# EAGLE board X04A-010-B-XB (EAGLE 9.6.2)
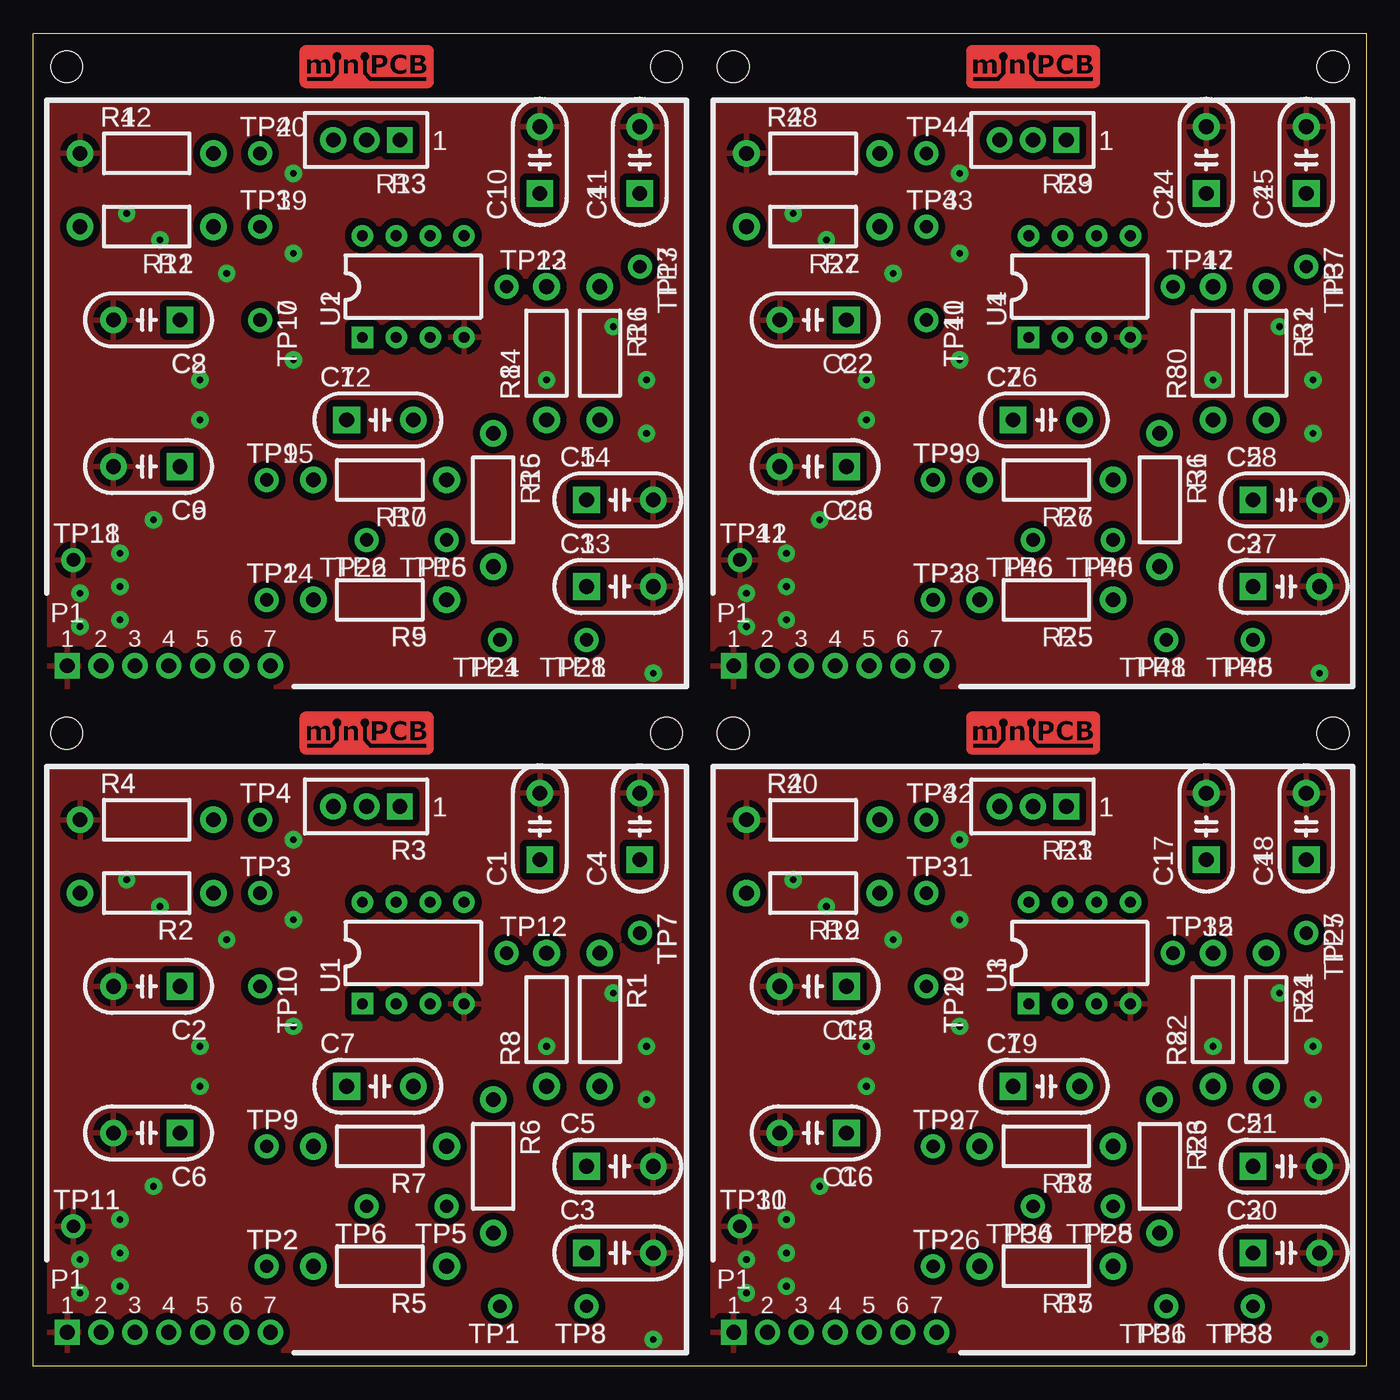
[diagram p0: board, top side]
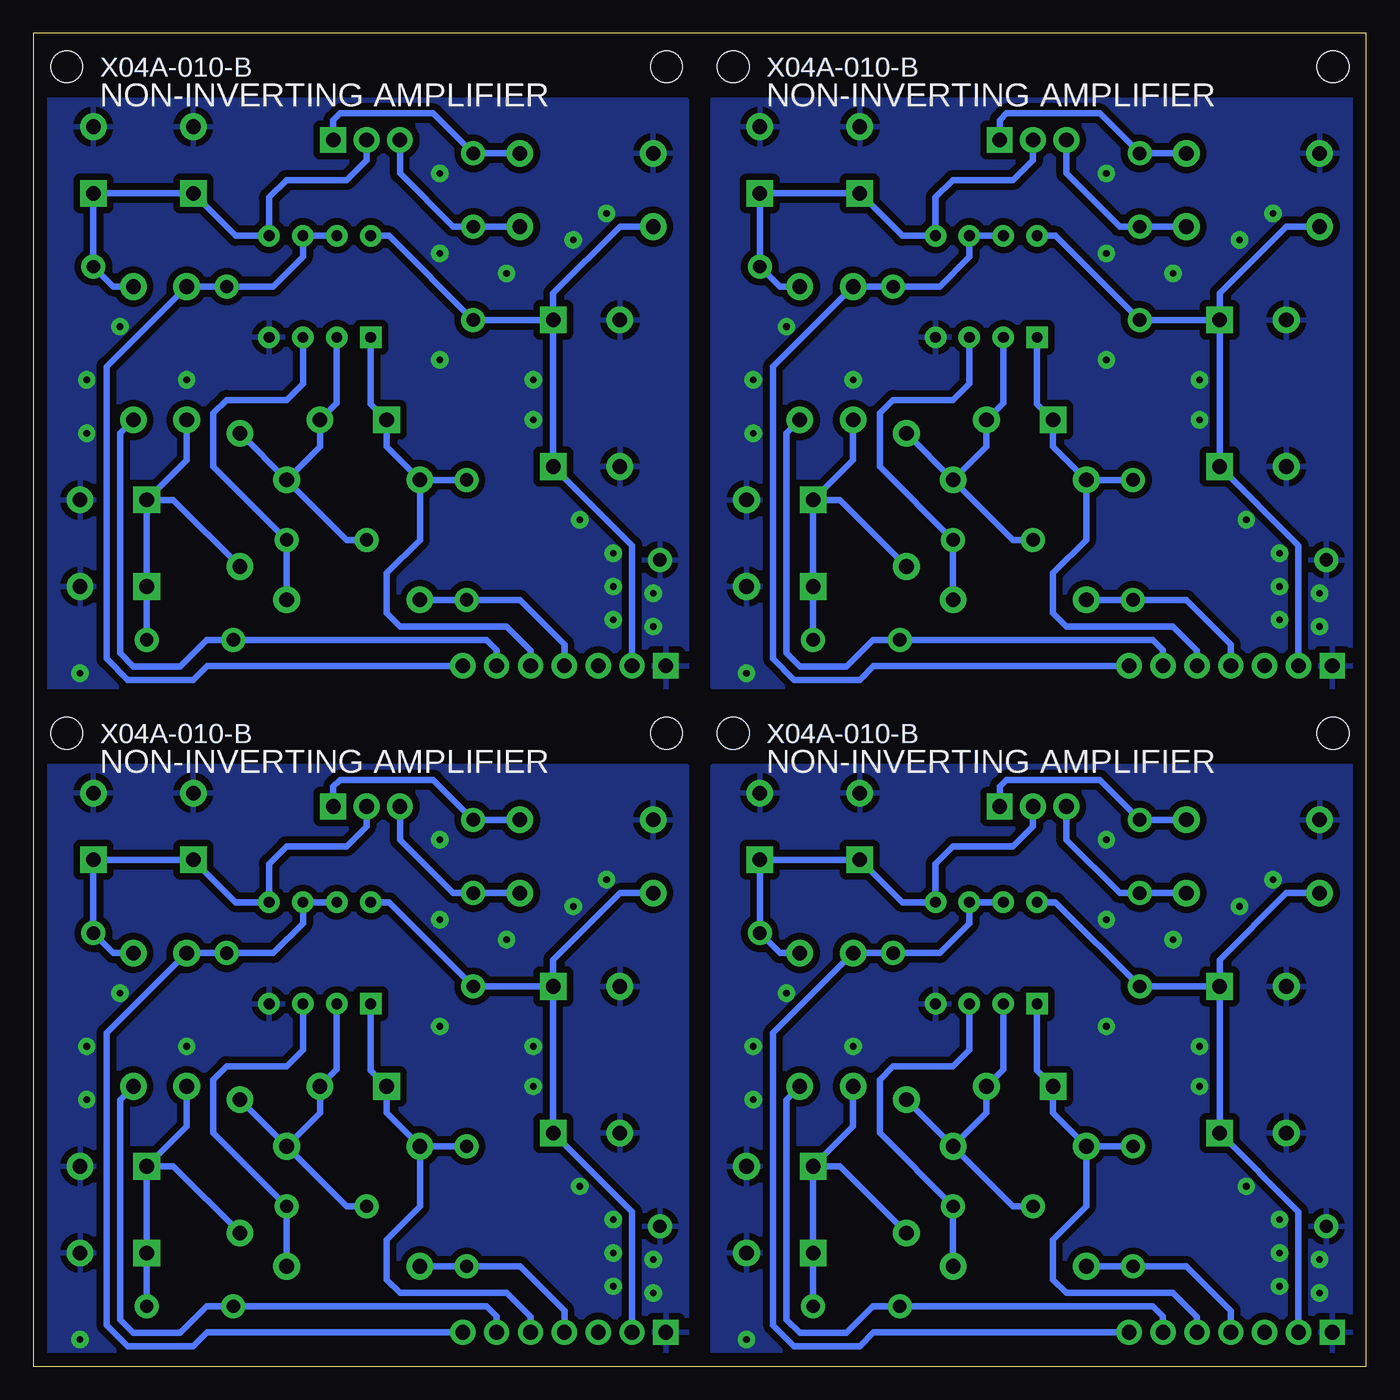
[diagram p1: board, bottom side, seen from below]

Size 100 x 100 mm. Coordinates in mm from the lower left corner, seen from the top.
Outline: 0,0 0,100 100,100 100,0 0,0
Copper layers (1*16): Top 0.035mm / dielectric 1.5mm / Bottom 0.035mm
Design rules "minipcb-THD": minimum track width 0.5mm, minimum drill 0.5mm, track to track 0.5mm, track to pad 0.5mm, pad to pad 0.5mm, via to via 0.5mm, smd to smd 0mil, copper to edge 1mm, drill to drill 1mm, minimum pad ring 0.4mm, minimum via ring 0.4mm, stop-mask expansion 0.1mm, vias tented up to drill 0.6mm, thermal gap 0.5mm

## Footprints (pad centres in the part's own frame; a part is rotated, then mirrored left to right if it is on the bottom)
C050-024X044 = drill 1.1 pad 2 square: 1 -2.5,0 | drill 1.1 pad 2: 2 2.5,0
MINIPCB_7P_50X50 = drill 1.1 square: 1 2.54,2.54 | drill 1.1: 2 5.08,2.54; 3 7.62,2.54; 4 10.16,2.54; 5 12.7,2.54; 6 15.24,2.54; 7 17.78,2.54 | hole 2.4: 47.5,47.5; 2.5,47.5
0207/10 = drill 1.1 pad 2: 1 -5,0; 2 5,0
TRIM_0100 = drill 1.1 pad 1.93 square: 1 0,0 | drill 1.1 pad 1.93: 2 2.5,0; 3 5,0
PINS_1_TESTPOINT_KE5000_NOTEXT = drill 1: 1 0,0
DIL08 = drill 0.813 square: 1 -3.81,-3.81 | drill 0.813: 2 -1.27,-3.81; 3 1.27,-3.81; 4 3.81,-3.81; 5 3.81,3.81; 6 1.27,3.81; 7 -1.27,3.81; 8 -3.81,3.81

## Placement (x,y rotation side)
C1  [C050-024X044]  38,40.5 90 top
C2  [C050-024X044]  8.5,28.5 180 top
C3  [C050-024X044]  44,8.5 0 top
C4  [C050-024X044]  45.5,40.5 90 top
C5  [C050-024X044]  44,15 0 top
C6  [C050-024X044]  8.5,17.5 180 top
C7  [C050-024X044]  26,21 0 top
C8  [C050-024X044]  8.5,78.5 180 top
C9  [C050-024X044]  8.5,67.5 180 top
C10  [C050-024X044]  38,90.5 90 top
C11  [C050-024X044]  45.5,90.5 90 top
C12  [C050-024X044]  26,71 0 top
C13  [C050-024X044]  44,58.5 0 top
C14  [C050-024X044]  44,65 0 top
C15  [C050-024X044]  58.5,28.5 180 top
C16  [C050-024X044]  58.5,17.5 180 top
C17  [C050-024X044]  88,40.5 90 top
C18  [C050-024X044]  95.5,40.5 90 top
C19  [C050-024X044]  76,21 0 top
C20  [C050-024X044]  94,8.5 0 top
C21  [C050-024X044]  94,15 0 top
C22  [C050-024X044]  58.5,78.5 180 top
C23  [C050-024X044]  58.5,67.5 180 top
C24  [C050-024X044]  88,90.5 90 top
C25  [C050-024X044]  95.5,90.5 90 top
C26  [C050-024X044]  76,71 0 top
C27  [C050-024X044]  94,58.5 0 top
C28  [C050-024X044]  94,65 0 top
E$1  [MINIPCB_PANEL_IMAGEFRAME]  -25,-30 0 top  (outside the outline)
P1-  [MINIPCB_7P_50X50]  0,0 0 top
P1-1  [MINIPCB_7P_50X50]  0,50 0 top
P1-2  [MINIPCB_7P_50X50]  50,0 0 top
P1-3  [MINIPCB_7P_50X50]  50,50 0 top
R1  [0207/10]  42.5,26 270 top
R2  [0207/10]  8.5,35.5 180 top
R3  [TRIM_0100]  27.5,42 180 top
R4  [0207/10]  8.5,41 0 top
R5  [0207/10]  26,7.5 180 top
R6  [0207/10]  34.5,15 270 top
R7  [0207/10]  26,16.5 180 top
R8  [0207/10]  38.5,26 90 top
R9  [0207/10]  26,57.5 180 top
R10  [0207/10]  26,66.5 180 top
R11  [0207/10]  8.5,85.5 180 top
R12  [0207/10]  8.5,91 0 top
R13  [TRIM_0100]  27.5,92 180 top
R14  [0207/10]  38.5,76 90 top
R15  [0207/10]  34.5,65 270 top
R16  [0207/10]  42.5,76 270 top
R17  [0207/10]  76,7.5 180 top
R18  [0207/10]  76,16.5 180 top
R19  [0207/10]  58.5,35.5 180 top
R20  [0207/10]  58.5,41 0 top
R21  [TRIM_0100]  77.5,42 180 top
R22  [0207/10]  88.5,26 90 top
R23  [0207/10]  84.5,15 270 top
R24  [0207/10]  92.5,26 270 top
R25  [0207/10]  76,57.5 180 top
R26  [0207/10]  76,66.5 180 top
R27  [0207/10]  58.5,85.5 180 top
R28  [0207/10]  58.5,91 0 top
R29  [TRIM_0100]  77.5,92 180 top
R30  [0207/10]  88.5,76 90 top
R31  [0207/10]  84.5,65 270 top
R32  [0207/10]  92.5,76 270 top
TP1  [PINS_1_TESTPOINT_KE5000_NOTEXT]  35,4.5 180 top
TP2  [PINS_1_TESTPOINT_KE5000_NOTEXT]  17.5,7.5 0 top
TP3  [PINS_1_TESTPOINT_KE5000_NOTEXT]  17,35.5 0 top
TP4  [PINS_1_TESTPOINT_KE5000_NOTEXT]  17,41 0 top
TP5  [PINS_1_TESTPOINT_KE5000_NOTEXT]  31,12 180 top
TP6  [PINS_1_TESTPOINT_KE5000_NOTEXT]  25,12 180 top
TP7  [PINS_1_TESTPOINT_KE5000_NOTEXT]  45.5,32.5 270 top
TP8  [PINS_1_TESTPOINT_KE5000_NOTEXT]  41.5,4.5 180 top
TP9  [PINS_1_TESTPOINT_KE5000_NOTEXT]  17.5,16.5 0 top
TP10  [PINS_1_TESTPOINT_KE5000_NOTEXT]  17,28.5 270 top
TP11  [PINS_1_TESTPOINT_KE5000_NOTEXT]  3,10.5 0 top
TP12  [PINS_1_TESTPOINT_KE5000_NOTEXT]  35.5,31 270 top
TP13  [PINS_1_TESTPOINT_KE5000_NOTEXT]  45.5,82.5 270 top
TP14  [PINS_1_TESTPOINT_KE5000_NOTEXT]  17.5,57.5 0 top
TP15  [PINS_1_TESTPOINT_KE5000_NOTEXT]  17.5,66.5 0 top
TP16  [PINS_1_TESTPOINT_KE5000_NOTEXT]  31,62 180 top
TP17  [PINS_1_TESTPOINT_KE5000_NOTEXT]  17,78.5 270 top
TP18  [PINS_1_TESTPOINT_KE5000_NOTEXT]  3,60.5 0 top
TP19  [PINS_1_TESTPOINT_KE5000_NOTEXT]  17,85.5 0 top
TP20  [PINS_1_TESTPOINT_KE5000_NOTEXT]  17,91 0 top
TP21  [PINS_1_TESTPOINT_KE5000_NOTEXT]  41.5,54.5 180 top
TP22  [PINS_1_TESTPOINT_KE5000_NOTEXT]  25,62 180 top
TP23  [PINS_1_TESTPOINT_KE5000_NOTEXT]  35.5,81 270 top
TP24  [PINS_1_TESTPOINT_KE5000_NOTEXT]  35,54.5 180 top
TP25  [PINS_1_TESTPOINT_KE5000_NOTEXT]  95.5,32.5 270 top
TP26  [PINS_1_TESTPOINT_KE5000_NOTEXT]  67.5,7.5 0 top
TP27  [PINS_1_TESTPOINT_KE5000_NOTEXT]  67.5,16.5 0 top
TP28  [PINS_1_TESTPOINT_KE5000_NOTEXT]  81,12 180 top
TP29  [PINS_1_TESTPOINT_KE5000_NOTEXT]  67,28.5 270 top
TP30  [PINS_1_TESTPOINT_KE5000_NOTEXT]  53,10.5 0 top
TP31  [PINS_1_TESTPOINT_KE5000_NOTEXT]  67,35.5 0 top
TP32  [PINS_1_TESTPOINT_KE5000_NOTEXT]  67,41 0 top
TP33  [PINS_1_TESTPOINT_KE5000_NOTEXT]  91.5,4.5 180 top
TP34  [PINS_1_TESTPOINT_KE5000_NOTEXT]  75,12 180 top
TP35  [PINS_1_TESTPOINT_KE5000_NOTEXT]  85.5,31 270 top
TP36  [PINS_1_TESTPOINT_KE5000_NOTEXT]  85,4.5 180 top
TP37  [PINS_1_TESTPOINT_KE5000_NOTEXT]  95.5,82.5 270 top
TP38  [PINS_1_TESTPOINT_KE5000_NOTEXT]  67.5,57.5 0 top
TP39  [PINS_1_TESTPOINT_KE5000_NOTEXT]  67.5,66.5 0 top
TP40  [PINS_1_TESTPOINT_KE5000_NOTEXT]  81,62 180 top
TP41  [PINS_1_TESTPOINT_KE5000_NOTEXT]  67,78.5 270 top
TP42  [PINS_1_TESTPOINT_KE5000_NOTEXT]  53,60.5 0 top
TP43  [PINS_1_TESTPOINT_KE5000_NOTEXT]  67,85.5 0 top
TP44  [PINS_1_TESTPOINT_KE5000_NOTEXT]  67,91 0 top
TP45  [PINS_1_TESTPOINT_KE5000_NOTEXT]  91.5,54.5 180 top
TP46  [PINS_1_TESTPOINT_KE5000_NOTEXT]  75,62 180 top
TP47  [PINS_1_TESTPOINT_KE5000_NOTEXT]  85.5,81 270 top
TP48  [PINS_1_TESTPOINT_KE5000_NOTEXT]  85,54.5 180 top
U1  [DIL08]  28.5,31 0 top
U2  [DIL08]  28.5,81 0 top
U3  [DIL08]  78.5,31 0 top
U4  [DIL08]  78.5,81 0 top

## Library data of the parts
C1-C28 E$1 R1-R32 TP1-TP48 U1-U4 = minipcb
P1- P1-1-P1-3 = minipcb; PART_NUMBER: X04A-010-B; REVISION: B

## Nets
BIAS: C1.1 C4.1 R1.1 R3.2 TP7.1 U1.5
BIAS1: C10.1 C11.1 R13.2 R16.1 TP13.1 U2.5
BIAS2: C17.1 C18.1 R21.2 R24.1 TP25.1 U3.5
BIAS3: C24.1 C25.1 R29.2 R32.1 TP37.1 U4.5
BIAS_CONTROL: P1-.6 R1.2 TP1.1
BIAS_CONTROL1: P1-1.6 R16.2 TP24.1
BIAS_CONTROL2: P1-2.6 R24.2 TP36.1
BIAS_CONTROL3: P1-3.6 R32.2 TP48.1
GND: C1.2 C2.2 C3.2 C4.2 C5.2 C6.2 P1-.1 R4.1 TP11.1 U1.4
GND1: C8.2 C9.2 C10.2 C11.2 C13.2 C14.2 P1-1.1 R12.1 TP18.1 U2.4
GND2: C15.2 C16.2 C17.2 C18.2 C20.2 C21.2 P1-2.1 R20.1 TP30.1 U3.4
GND3: C22.2 C23.2 C24.2 C25.2 C27.2 C28.2 P1-3.1 R28.1 TP42.1 U4.4
IN: P1-.4 R5.2 TP2.1
IN1: P1-1.4 R9.2 TP14.1
IN2: P1-2.4 R17.2 TP26.1
IN3: P1-3.4 R25.2 TP38.1
IN+: R5.1 TP5.1 U1.3
IN+1: R9.1 TP16.1 U2.3
IN+2: R17.1 TP28.1 U3.3
IN+3: R25.1 TP40.1 U4.3
NC: P1-.3
NC1: P1-1.3
NC2: P1-2.3
NC3: P1-3.3
OUT: C7.1 P1-.5 R7.2 TP9.1 U1.1
OUT1: C12.1 P1-1.5 R10.2 TP15.1 U2.1
OUT2: C19.1 P1-2.5 R18.2 TP27.1 U3.1
OUT3: C26.1 P1-3.5 R26.2 TP39.1 U4.1
POT.1: R3.1 R4.2 TP4.1
POT.2: R11.1 R13.3 TP19.1
POT.3: R2.1 R3.3 TP3.1
POT.4: R12.2 R13.1 TP20.1
POT.5: R19.1 R21.3 TP31.1
POT.6: R20.2 R21.1 TP32.1
POT.7: R27.1 R29.3 TP43.1
POT.8: R28.2 R29.1 TP44.1
V+: C2.1 C6.1 P1-.2 R2.2 TP10.1 U1.8
V+1: C8.1 C9.1 P1-1.2 R11.2 TP17.1 U2.8
V+2: C15.1 C16.1 P1-2.2 R19.2 TP29.1 U3.8
V+3: C22.1 C23.1 P1-3.2 R27.2 TP41.1 U4.8
VFB: C7.2 R6.1 R7.1 TP6.1 U1.2
VFB1: C12.2 R10.1 R15.1 TP22.1 U2.2
VFB2: C19.2 R18.1 R23.1 TP34.1 U3.2
VFB3: C26.2 R26.1 R31.1 TP46.1 U4.2
VREF: P1-.7 R8.2 TP12.1 U1.6 U1.7
VREF1: P1-1.7 R14.2 TP23.1 U2.6 U2.7
VREF2: P1-2.7 R22.2 TP35.1 U3.6 U3.7
VREF3: P1-3.7 R30.2 TP47.1 U4.6 U4.7
VREF_FILTERED: C3.1 C5.1 R6.2 R8.1 TP8.1
VREF_FILTERED1: C13.1 C14.1 R14.1 R15.2 TP21.1
VREF_FILTERED2: C20.1 C21.1 R22.1 R23.2 TP33.1
VREF_FILTERED3: C27.1 C28.1 R30.1 R31.2 TP45.1

## Tracks (layer width: path | path; a pad name or v marks a point on that pad's centre or on a via)
BIAS
  Bottom 0.5: R3.2 25,40.5 26.5,39 31,39 32.31,37.69 U1.5 34.81,34.81 C1.1 C4.1 TP7.1 44,31 R1.1
BIAS1
  Bottom 0.5: R13.2 25,90.5 26.5,89 31,89 32.31,87.69 U2.5 34.81,84.81 C10.1 C11.1 TP13.1 44,81 R16.1
BIAS2
  Bottom 0.5: R21.2 75,40.5 76.5,39 81,39 82.31,37.69 U3.5 84.81,34.81 C17.1 C18.1 TP25.1 94,31 R24.1
BIAS3
  Bottom 0.5: R29.2 75,90.5 76.5,89 81,89 82.31,87.69 U4.5 84.81,84.81 C24.1 C25.1 TP37.1 94,81 R32.1
BIAS_CONTROL
  Bottom 0.5: P1-.6 15.24,3.74 16,4.5 TP1.1 37,4.5 39,2.5 42.5,2.5 43.5,3.5 43.5,20 R1.2
BIAS_CONTROL1
  Bottom 0.5: P1-1.6 15.24,53.74 16,54.5 TP24.1 37,54.5 39,52.5 42.5,52.5 43.5,53.5 43.5,70 R16.2
BIAS_CONTROL2
  Bottom 0.5: P1-2.6 65.24,3.74 66,4.5 TP36.1 87,4.5 89,2.5 92.5,2.5 93.5,3.5 93.5,20 R24.2
BIAS_CONTROL3
  Bottom 0.5: P1-3.6 65.24,53.74 66,54.5 TP48.1 87,54.5 89,52.5 92.5,52.5 93.5,53.5 93.5,70 R32.2
GND  (via drill 0.5)
  other vias: 7,36.5 9.5,34.5 9,13.5 6.5,11 6.5,8.5 6.5,6 12.5,21 12.5,24 19.5,25.5 19.5,33.5 14.5,32 19.5,39.5 43.5,28 46,24 38.5,24 46,20 46.5,2 3.5,8 3.5,5.5
  pour Top: 1,1 49,1 49,45 1,45
  pour Bottom: 1,1 49,1 49,45 1,45
GND1  (via drill 0.5)
  other vias: 7,86.5 9.5,84.5 9,63.5 6.5,61 6.5,58.5 6.5,56 12.5,71 12.5,74 19.5,75.5 19.5,83.5 14.5,82 19.5,89.5 43.5,78 46,74 38.5,74 46,70 46.5,52 3.5,58 3.5,55.5
  pour Top: 1,51 49,51 49,95 1,95
  pour Bottom: 1,51 49,51 49,95 1,95
GND2  (via drill 0.5)
  other vias: 57,36.5 59.5,34.5 59,13.5 56.5,11 56.5,8.5 56.5,6 62.5,21 62.5,24 69.5,25.5 69.5,33.5 64.5,32 69.5,39.5 93.5,28 96,24 88.5,24 96,20 96.5,2 53.5,8 53.5,5.5
  pour Top: 51,1 99,1 99,45 51,45
  pour Bottom: 51,1 99,1 99,45 51,45
GND3  (via drill 0.5)
  other vias: 57,86.5 59.5,84.5 59,63.5 56.5,61 56.5,58.5 56.5,56 62.5,71 62.5,74 69.5,75.5 69.5,83.5 64.5,82 69.5,89.5 93.5,78 96,74 88.5,74 96,70 96.5,52 53.5,58 53.5,55.5
  pour Top: 51,51 99,51 99,95 51,95
  pour Bottom: 51,51 99,51 99,95 51,95
IN
  Bottom 0.5: R5.2 TP2.1 13.5,7.5 10.16,4.16 P1-.4
IN1
  Bottom 0.5: R9.2 TP14.1 13.5,57.5 10.16,54.16 P1-1.4
IN2
  Bottom 0.5: R17.2 TP26.1 63.5,7.5 60.16,4.16 P1-2.4
IN3
  Bottom 0.5: R25.2 TP38.1 63.5,57.5 60.16,54.16 P1-3.4
IN+
  Bottom 0.5: R5.1 TP5.1 36.5,17.5 36.5,21.5 35.5,22.5 31,22.5 29.77,23.73 U1.3
IN+1
  Bottom 0.5: R9.1 TP16.1 36.5,67.5 36.5,71.5 35.5,72.5 31,72.5 29.77,73.73 U2.3
IN+2
  Bottom 0.5: R17.1 TP28.1 86.5,17.5 86.5,21.5 85.5,22.5 81,22.5 79.77,23.73 U3.3
IN+3
  Bottom 0.5: R25.1 TP40.1 86.5,67.5 86.5,71.5 85.5,72.5 81,72.5 79.77,73.73 U4.3
OUT
  Bottom 0.5: TP9.1 R7.2 | U1.1 24.69,22.19 C7.1 23.5,19 R7.2 | P1-.5 12.7,3.7 14.5,5.5 22.5,5.5 23.5,6.5 23.5,9.5 21,12 R7.2
OUT1
  Bottom 0.5: TP15.1 R10.2 | U2.1 24.69,72.19 C12.1 23.5,69 R10.2 | P1-1.5 12.7,53.7 14.5,55.5 22.5,55.5 23.5,56.5 23.5,59.5 21,62 R10.2
OUT2
  Bottom 0.5: TP27.1 R18.2 | U3.1 74.69,22.19 C19.1 73.5,19 R18.2 | P1-2.5 62.7,3.7 64.5,5.5 72.5,5.5 73.5,6.5 73.5,9.5 71,12 R18.2
OUT3
  Bottom 0.5: TP39.1 R26.2 | U4.1 74.69,72.19 C26.1 73.5,69 R26.2 | P1-3.5 62.7,53.7 64.5,55.5 72.5,55.5 73.5,56.5 73.5,59.5 71,62 R26.2
POT.1
  Bottom 0.5: R4.2 TP4.1 20,44 27,44 27.5,43.5 R3.1
POT.2
  Bottom 0.5: R11.1 TP19.1 18.5,85.5 22.5,89.5 R13.3
POT.3
  Bottom 0.5: R2.1 TP3.1 18.5,35.5 22.5,39.5 R3.3
POT.4
  Bottom 0.5: R12.2 TP20.1 20,94 27,94 27.5,93.5 R13.1
POT.5
  Bottom 0.5: R19.1 TP31.1 68.5,35.5 72.5,39.5 R21.3
POT.6
  Bottom 0.5: R20.2 TP32.1 70,44 77,44 77.5,43.5 R21.1
POT.7
  Bottom 0.5: R27.1 TP43.1 68.5,85.5 72.5,89.5 R29.3
POT.8
  Bottom 0.5: R28.2 TP44.1 70,94 77,94 77.5,93.5 R29.1
V+
  Bottom 0.5: P1-.2 5.08,11.58 C6.1 C2.1 | R2.2 6,35.5 11,30.5 C2.1 | C2.1 TP10.1 23.31,34.81 U1.8
V+1
  Bottom 0.5: P1-1.2 5.08,61.58 C9.1 C8.1 | R11.2 6,85.5 11,80.5 C8.1 | C8.1 TP17.1 23.31,84.81 U2.8
V+2
  Bottom 0.5: P1-2.2 55.08,11.58 C16.1 C15.1 | R19.2 56,35.5 61,30.5 C15.1 | C15.1 TP29.1 73.31,34.81 U3.8
V+3
  Bottom 0.5: P1-3.2 55.08,61.58 C23.1 C22.1 | R27.2 56,85.5 61,80.5 C22.1 | C22.1 TP41.1 73.31,84.81 U4.8
VFB
  Bottom 0.5: U1.2 27.23,22.27 C7.2 28.5,19 R7.1 | TP6.1 26.5,12 R7.1 | R7.1 R6.1
VFB1
  Bottom 0.5: U2.2 27.23,72.27 C12.2 28.5,69 R10.1 | TP22.1 26.5,62 R10.1 | R10.1 R15.1
VFB2
  Bottom 0.5: U3.2 77.23,22.27 C19.2 78.5,19 R18.1 | TP34.1 76.5,12 R18.1 | R18.1 R23.1
VFB3
  Bottom 0.5: U4.2 77.23,72.27 C26.2 78.5,69 R26.1 | TP46.1 76.5,62 R26.1 | R26.1 R31.1
VREF
  Bottom 0.5: U1.7 U1.6 29.77,33.23 32,31 TP12.1 R8.2 44.5,25 44.5,3.09 42.91,1.5 38,1.5 36.96,2.54 P1-.7
VREF1
  Bottom 0.5: U2.7 U2.6 29.77,83.23 32,81 TP23.1 R14.2 44.5,75 44.5,53.09 42.91,51.5 38,51.5 36.96,52.54 P1-1.7
VREF2
  Bottom 0.5: U3.7 U3.6 79.77,33.23 82,31 TP35.1 R22.2 94.5,25 94.5,3.09 92.91,1.5 88,1.5 86.96,2.54 P1-2.7
VREF3
  Bottom 0.5: U4.7 U4.6 79.77,83.23 82,81 TP47.1 R30.2 94.5,75 94.5,53.09 92.91,51.5 88,51.5 86.96,52.54 P1-3.7
VREF_FILTERED
  Bottom 0.5: R8.1 38.5,18 C5.1 | TP8.1 C3.1 C5.1 | R6.2 39.5,15 C5.1
VREF_FILTERED1
  Bottom 0.5: R14.1 38.5,68 C14.1 | TP21.1 C13.1 C14.1 | R15.2 39.5,65 C14.1
VREF_FILTERED2
  Bottom 0.5: R22.1 88.5,18 C21.1 | TP33.1 C20.1 C21.1 | R23.2 89.5,15 C21.1
VREF_FILTERED3
  Bottom 0.5: R30.1 88.5,68 C28.1 | TP45.1 C27.1 C28.1 | R31.2 89.5,65 C28.1

## Text on the board
bPlace: NON-INVERTING AMPLIFIER | NON-INVERTING AMPLIFIER | NON-INVERTING AMPLIFIER | NON-INVERTING AMPLIFIER
_tNames: R4 | R4 | TP4 | TP4 | R3 | R3 | TP3 | TP3 | C1 | C4 | C1 | C4 | R2 | TP7 | R2 | TP7 | TP12 | TP12 | TP10 | TP10 | R1 | R1 | U1 | U1 | C2 | C2 | C7 | C7 | R8 | R8 | TP9 | R6 | TP9 | R6 | C5 | C5 | C6 | C6 | R7 | R7 | TP11 | TP11 | TP6 | TP5 | C3 | TP6 | TP5 | C3 | TP2 | TP2 | R5 | R5 | TP1 | TP8 | TP1 | TP8 | R4 | R4 | TP4 | TP4 | R3 | R3 | TP3 | TP3 | C1 | C4 | C1 | C4 | R2 | TP7 | R2 | TP7 | TP12 | TP12 | TP10 | TP10 | R1 | R1 | U1 | U1 | C2 | C2 | C7 | C7 | R8 | R8 | TP9 | R6 | TP9 | R6 | C5 | C5 | C6 | C6 | R7 | R7 | TP11 | TP11 | TP6 | TP5 | C3 | TP6 | TP5 | C3 | TP2 | TP2 | R5 | R5 | TP1 | TP8 | TP1 | TP8